# Altium PCB 九键触摸面板-V1.PcbDoc
Units mm, origin at the board's own origin, x right, y up, seen from the top; angles counter-clockwise.
Board outline 77.48 x 77.48 mm, 2 copper layers (Top Layer, Bottom Layer), stack 1.571 mm thick; 101 components, 72 nets, 255 pads, 242 vias.
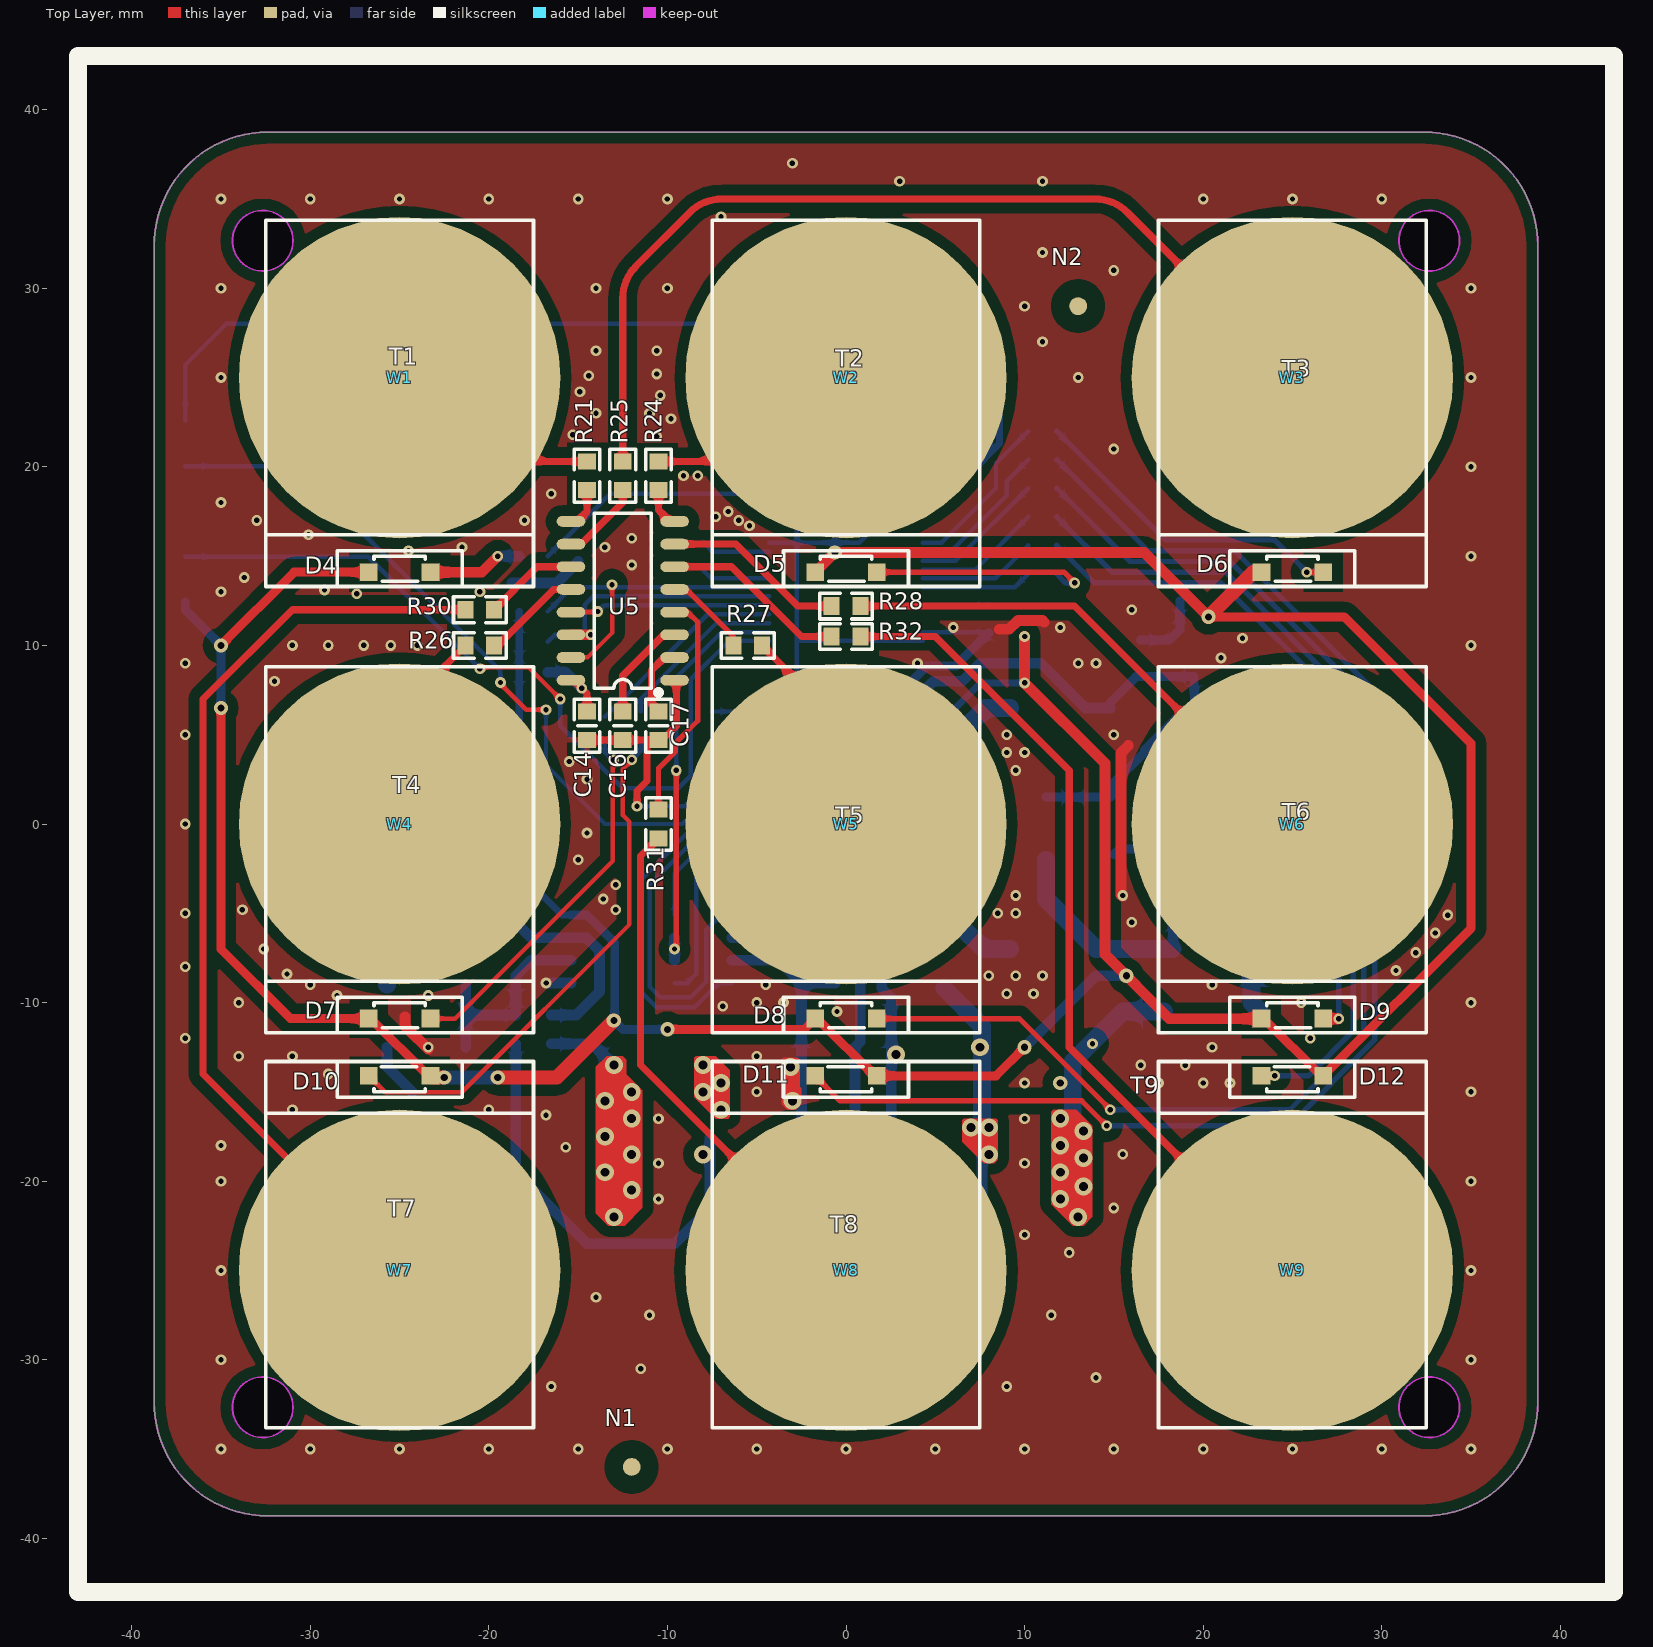
[diagram p0: Top Layer view]
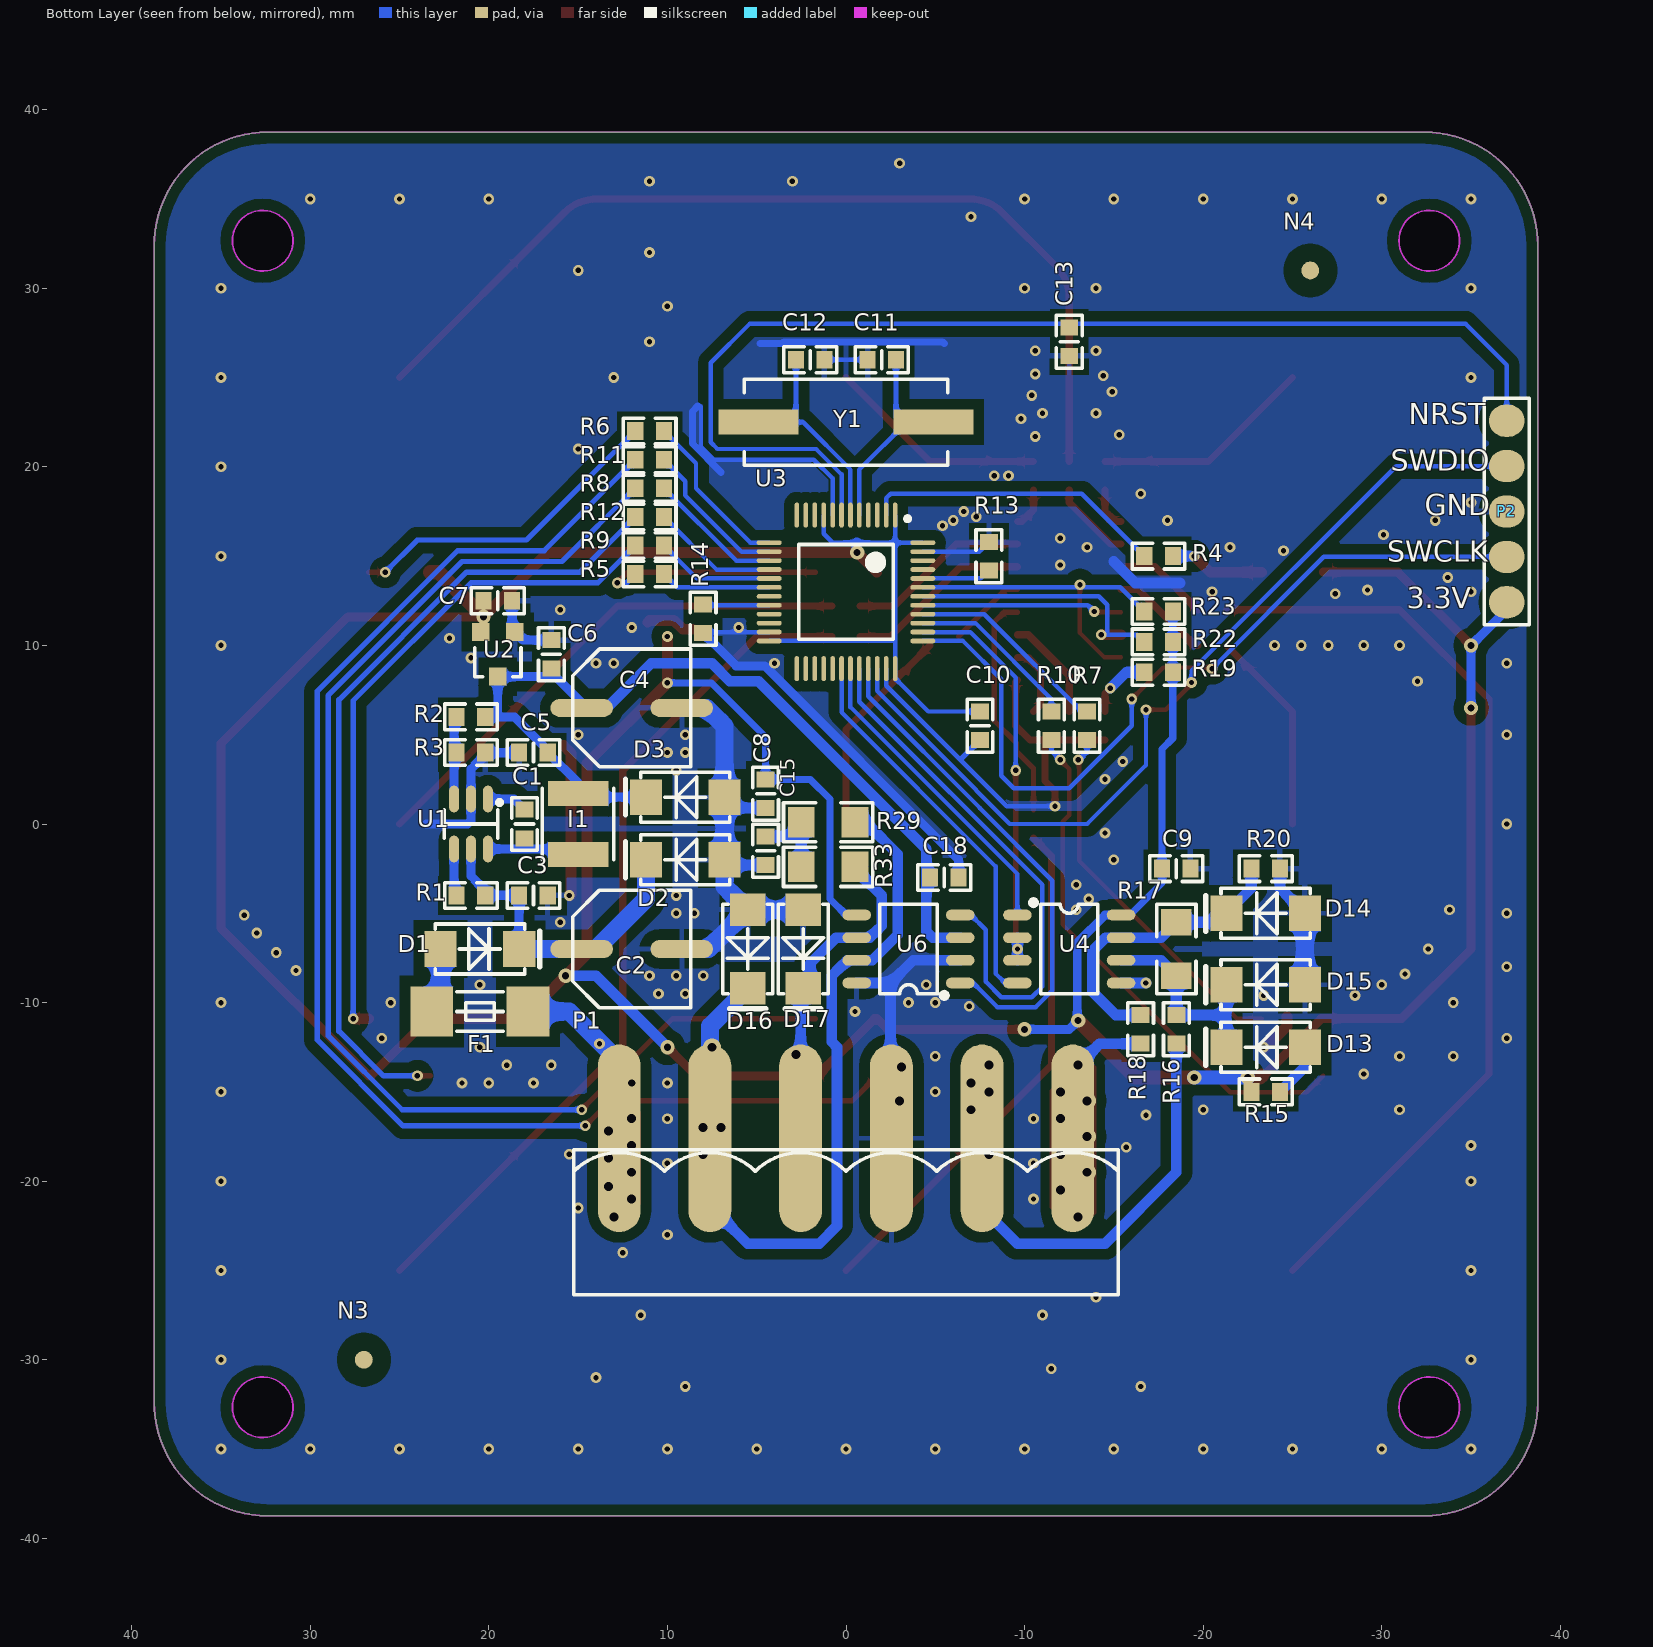
[diagram p1: Bottom Layer view, seen from below]
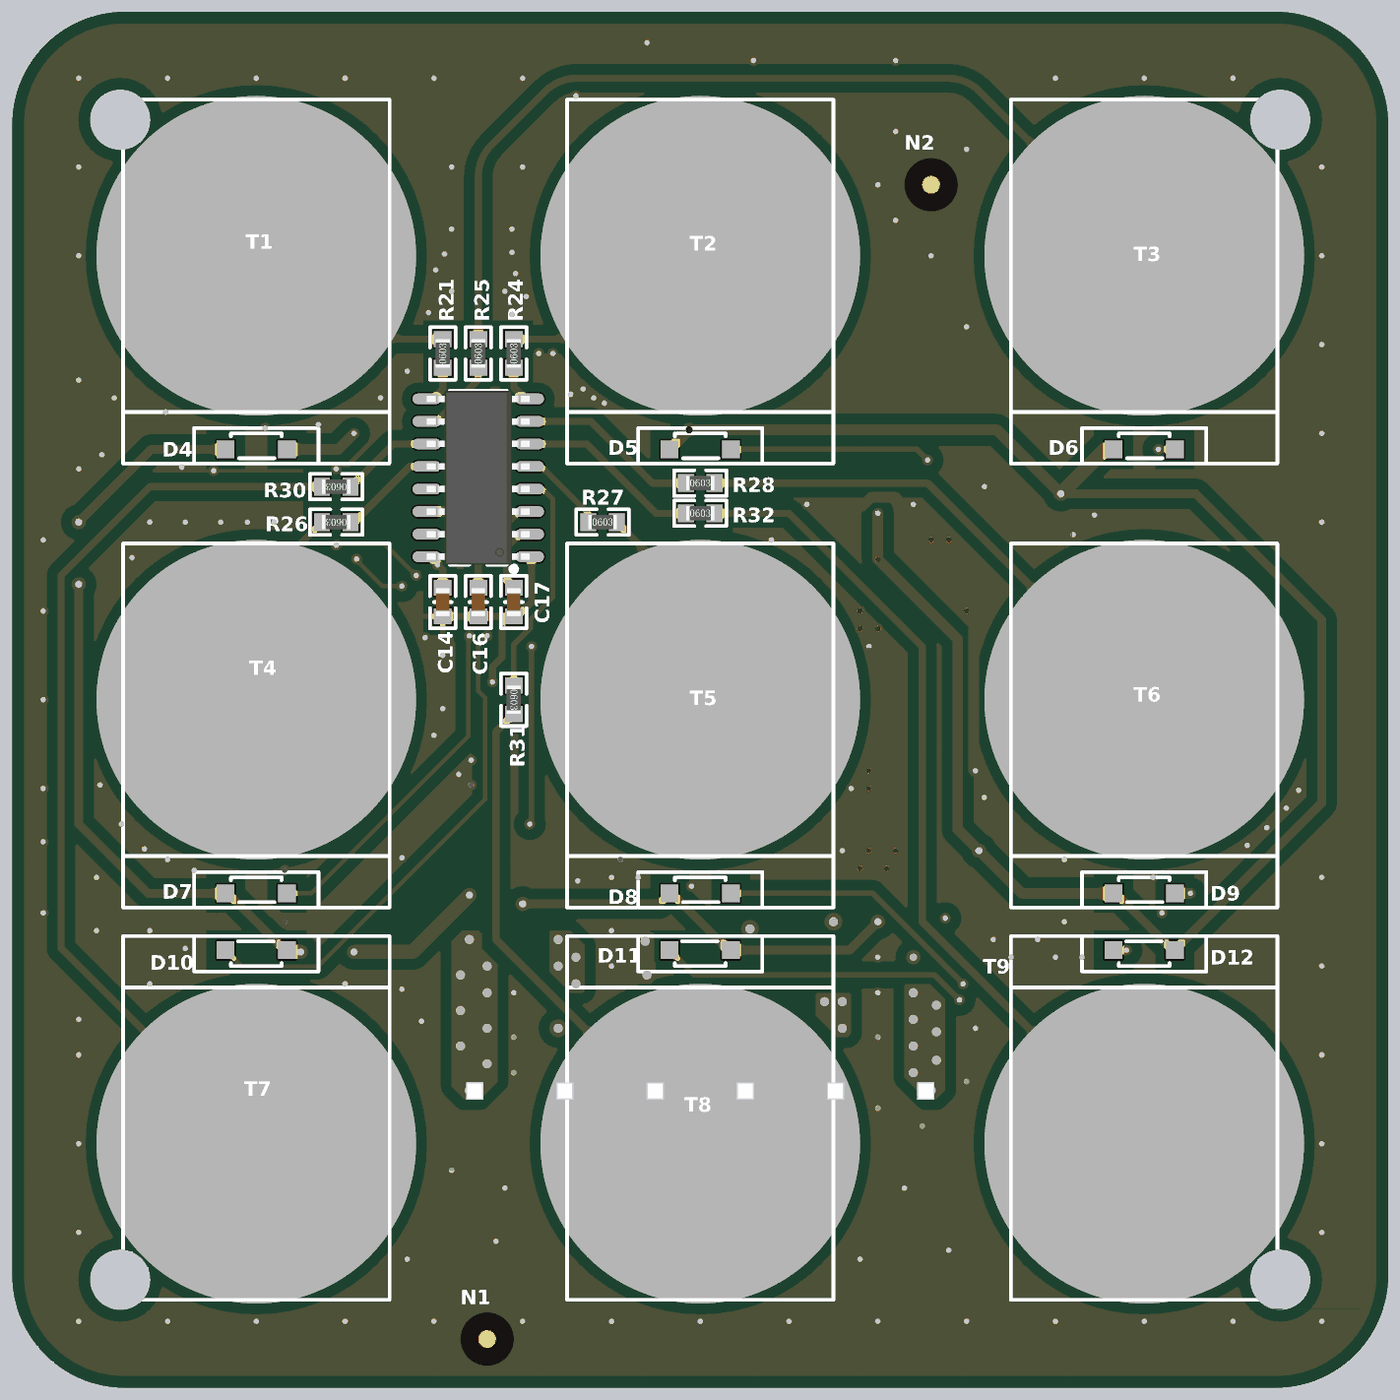
[diagram p2: 3D render of the assembled board from above, using the file's embedded part models]
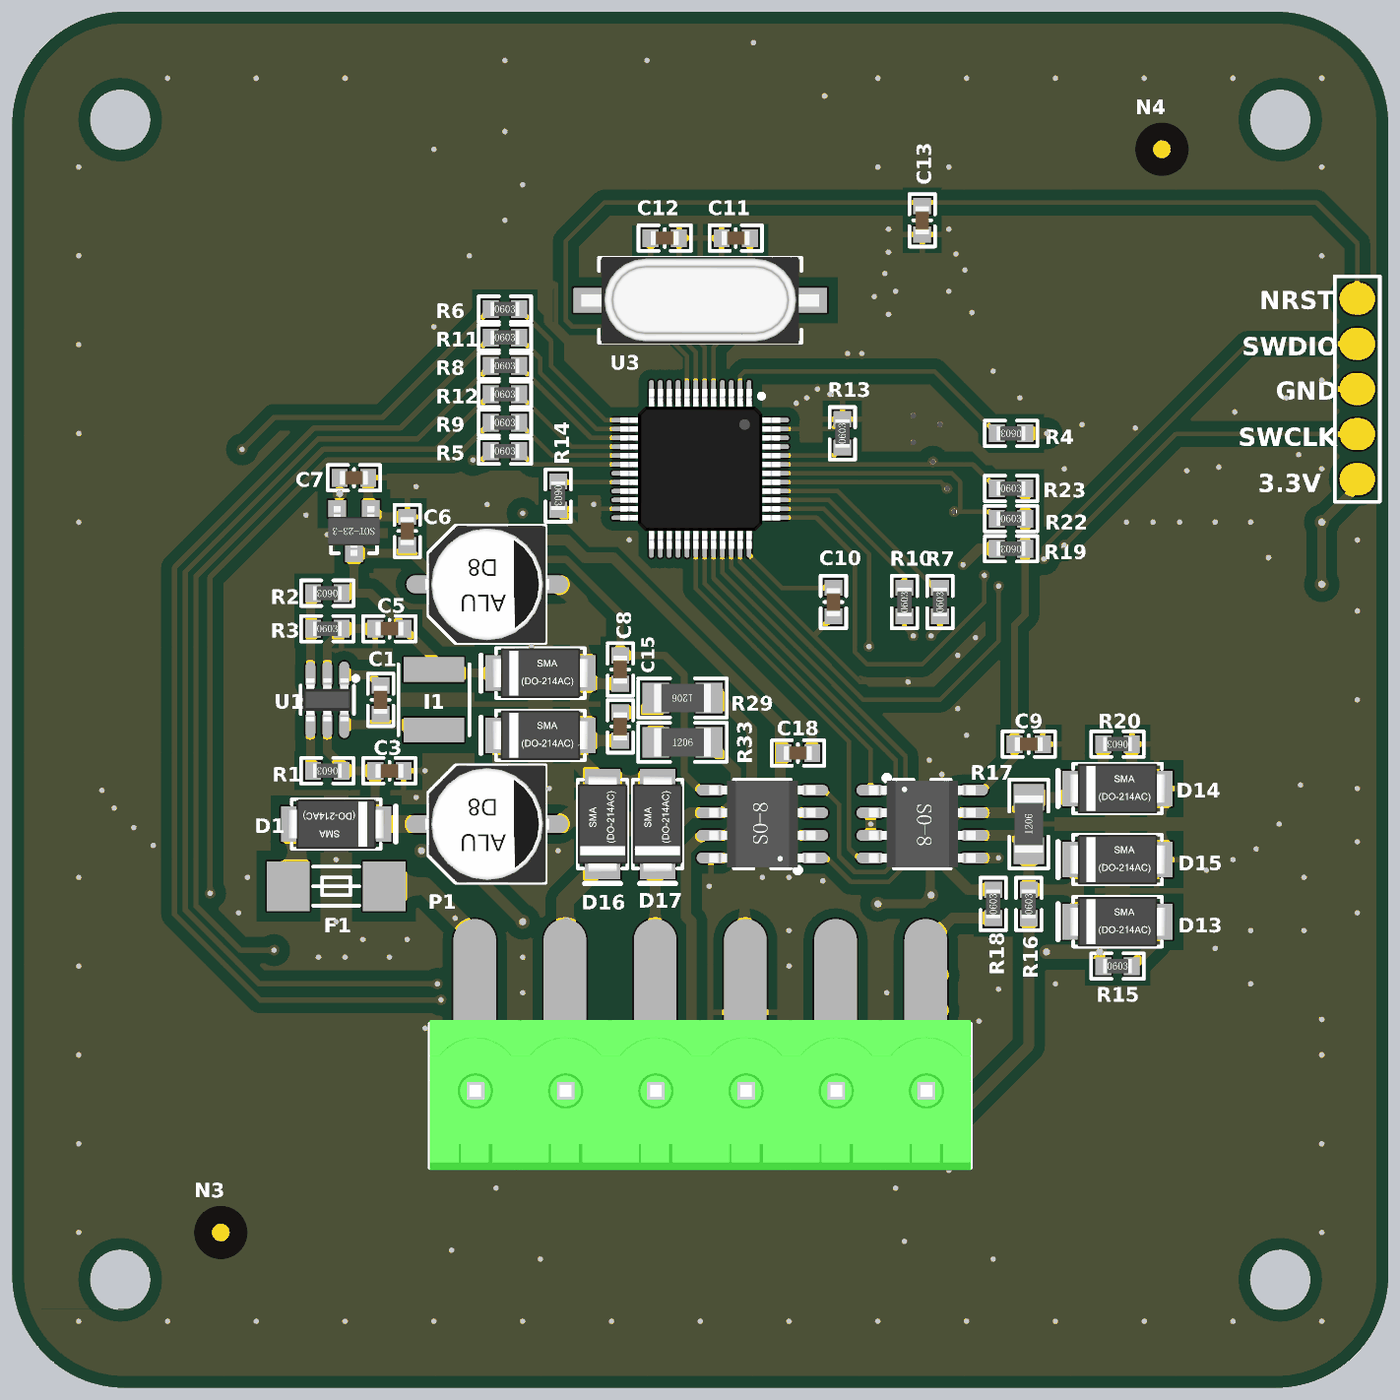
[diagram p3: 3D render of the assembled board from below, using the file's embedded part models]

## Layer stack, top to bottom
Top Solder: solder mask 0.0102, Solder Resist, Dk 3.5
Top Layer: signal copper 0.0356
Dielectric1: dielectric 1.5, FR-4, Dk 4.8
Bottom Layer: signal copper 0.0356
Bottom Solder: solder mask 0.0102, Solder Resist, Dk 3.5

## Board outline
-32.4,-38.74 cw(c-32.4,-32.4) -38.74,-32.4 -38.74,32.4 cw(c-32.4,32.4) -32.4,38.74 32.4,38.74 cw(c32.4,32.4) 38.74,32.4 38.74,-32.4 cw(c32.4,-32.4) 32.4,-38.74
cut-out: 30.962,-32.663 ccw(c32.662,-32.663) 32.662,-34.362 ccw(c32.662,-32.663) 34.362,-32.663 ccw(c32.662,-32.663) 32.662,-30.963 ccw(c32.662,-32.663)
cut-out: -32.663,-34.362 cw(c-32.663,-32.663) -34.363,-32.663 cw(c-32.663,-32.663) -32.663,-30.963 cw(c-32.663,-32.663) -30.963,-32.663 cw(c-32.663,-32.663)
cut-out: 32.662,30.963 cw(c32.662,32.663) 30.962,32.663 cw(c32.662,32.663) 32.662,34.362 cw(c32.662,32.663) 34.362,32.663 cw(c32.662,32.663)
cut-out: -32.663,30.963 cw(c-32.663,32.663) -34.363,32.663 cw(c-32.663,32.663) -32.663,34.362 cw(c-32.663,32.663) -30.963,32.663 cw(c-32.663,32.663)

## Design rules (kind name [scope] priority, off if disabled: settings)
Clearance Clearance敷铜间隔 [InPolygon] p1: gap=0.6
Clearance Clearance通用间隔 [All] p2: gap=0.3
PlaneConnect [All] p1: planeconnectstyle=Relief reliefexpansion=0.508 reliefentries=4 reliefconductorwidth=0.3 reliefairgap=0.3
PolygonConnect PolygonConnect_过孔 [All vs IsVia] p1: connectstyle=Direct reliefconductorwidth=0.254 reliefentries=4 polygonreliefangle="90 Angle" airgapwidth=0.254
PolygonConnect [All] p2: connectstyle=Relief reliefconductorwidth=0.3 reliefentries=4 polygonreliefangle="90 Angle" airgapwidth=0.6
RoutingVias [All] p1: holewidth=0.5 width=1 viastyle="Through Hole" minholewidth=0.4 minwidth=0.8 maxholewidth=10 maxwidth=10
SolderMaskExpansion [All] p1: expansion=0.102
Width [All] p1: maxlimit=10 minlimit=0.25 preferedwidth=0.5
29 further rules are at their usual default settings.

## Components (designator, comment, footprint, x,y, rotation, side; value= is the part's Value field where it differs from the comment)
C1 "104" C-0603 18,0 r90 bottom
C2 "100UF/35V" 贴片固态电容6.3*7.7 12,-7 r180 bottom
C3 "104" C-0603 17.5,-4 r0 bottom
C4 "470UF/10V" 贴片固态电容6.3*7.7 12,6.5 r180 bottom
C5 "104" C-0603 17.5,4 r180 bottom
C6 "224" C-0603 16.5,9.5 r270 bottom
C7 "106" C-0603 19.5,12.5 r0 bottom
C8 "104" C-0603 4.5,1.7 r90 bottom
C9 "104" C-0603 -18.5,-2.5 r0 bottom
C10 "104" C-0603 -7.5,5.5 r90 bottom
C11 "20P" C-0603 -2,26 r180 bottom
C12 "20P" C-0603 2,26 r0 bottom
C13 "104" C-0603 -12.5,27 r90 bottom
C14 "104" C-0603 -14.5,5.5 r90 top
C15 "472" C-0603 4.5,-1.5 r90 bottom
C16 "4.7p" C-0603 -12.5,5.5 r90 top
C17 "472" C-0603 -10.5,5.5 r90 top
C18 "224" C-0603 -5.5,-3 r0 bottom
D1 "M7" SMA 20.5,-7 r0 bottom
D2 "SMAJ30A" SMA 9,-2 r180 bottom
D3 "SMAJ5.0A" SMA 9,1.5 r180 bottom
D4 "" LED-335侧面绿色-M -25,14.1 r180 top
D5 "" LED-335侧面绿色-M 0,14.1 r180 top
D6 "" LED-335侧面绿色-M 25,14.1 r180 top
D7 "" LED-335侧面绿色-M -25,-10.9 r180 top
D8 "" LED-335侧面绿色-M 0,-10.9 r180 top
D9 "" LED-335侧面绿色-M 25,-10.9 r180 top
D10 "" LED-335侧面绿色-M -25,-14.1 r0 top
D11 "" LED-335侧面绿色-M 0,-14.1 r0 top
D12 "" LED-335侧面绿色-M 25,-14.1 r0 top
D13 "SS12" SMA -23.5,-12.5 r180 bottom
D14 "SMAJ5.0A" SMA -23.5,-5 r180 bottom
D15 "SMAJ5.0A" SMA -23.5,-9 r180 bottom
D16 "SMAJ5.0A" SMA 5.5,-7 r90 bottom
D17 "SMAJ5.0A" SMA 2.4,-7 r90 bottom
F1 "F0.5A" FUSE-1808 20.5,-10.5 r0 bottom
I1 "10uH" 4030 15,0 r90 bottom
N1 "光学定位点" MARK-1mm-3mm -12,-36 r0 top
N2 "光学定位点" MARK-1mm-3mm 13,29 r0 top
N3 "光学定位点" MARK-1mm-3mm 27,-30 r180 bottom
N4 "光学定位点" MARK-1mm-3mm -26,31 r180 bottom
P1 "" KF2EDG5.08V-6P-贴片 0,-22 r180 bottom
P2 "ST-LINK" 5P下载口 -37,17.5 r90 bottom
R1 "100K" R-0603 21,-4 r0 bottom
R2 "11K" R-0603 21,6 r0 bottom
R3 "2.1K" R-0603 21,4 r180 bottom
R4 "47" R-0603 -17.5,15 r0 bottom
R5 "47" R-0603 11,14 r180 bottom
R6 "47" R-0603 11,22 r180 bottom
R7 "47" R-0603 -13.5,5.5 r90 bottom
R8 "47" R-0603 11,18.8 r180 bottom
R9 "47" R-0603 11,15.6 r180 bottom
R10 "47" R-0603 -11.5,5.5 r90 bottom
R11 "47" R-0603 11,20.4 r180 bottom
R12 "47" R-0603 11,17.2 r180 bottom
R13 "10K" R-0603 -8,15 r90 bottom
R14 "10K" R-0603 8,11.5 r270 bottom
R15 "1K" R-0603 -23.5,-15 r180 bottom
R16 "10" R-0603 -18.5,-11.5 r90 bottom
R17 "1K" R-1206 -18.5,-7 r90 bottom
R18 "10" R-0603 -16.5,-11.5 r90 bottom
R19 "20" R-0603 -17.5,8.5 r0 bottom
R20 "1K" R-0603 -23.5,-2.5 r0 bottom
R21 "1K" R-0603 -14.5,19.5 r90 top
R22 "10K" R-0603 -17.5,10.2 r180 bottom
R23 "10K" R-0603 -17.5,11.9 r180 bottom
R24 "1K" R-0603 -10.5,19.5 r90 top
R25 "1K" R-0603 -12.5,19.5 r90 top
R26 "1K" R-0603 -20.5,10 r180 top
R27 "1K" R-0603 -5.5,10 r0 top
R28 "1K" R-0603 0,12.2 r0 top
R29 "62" R-1206 1,0.1 r0 bottom
R30 "1K" R-0603 -20.5,12 r180 top
R31 "1K" R-0603 -10.5,0 r270 top
R32 "1K" R-0603 0,10.5 r0 top
R33 "62" R-1206 1,-2.4 r180 bottom
T1 "" 焊点1mm -25,25 r0 top
T2 "" 焊点1mm 0,25 r0 top locked
T3 "" 焊点1mm 25,25 r0 top locked
T4 "" 焊点1mm -25,0 r0 top locked
T5 "" 焊点1mm 0,0 r0 top locked
T6 "" 焊点1mm 25,0 r0 top locked
T7 "" 焊点1mm -25,-25 r0 top locked
T8 "" 焊点1mm 0,-25 r0 top locked
T9 "" 焊点1mm 25,-25 r0 top locked
U1 "BL9341" SOT-23-6-m 21,0 r90 bottom
U2 "ME6206A33M3G" SOT-23 19.5,9.5 r90 bottom
U3 "GD32F103C8T6" LQFP48-L 0,13 r0 bottom
U4 "TP8485E-SR" SOP-8-m -12.5,-7 r270 bottom
U5 "XW09A" SOP-16-M -12.5,12.5 r90 top
U6 "TJA1051T/3" SOP-8-M -3.5,-7 r90 bottom
W1 "导光板" 导光板20.5*15*2 -25,25 r0 top locked
W2 "导光板" 导光板20.5*15*2 0,25 r0 top locked
W3 "导光板" 导光板20.5*15*2 25,25 r0 top locked
W4 "导光板" 导光板20.5*15*2 -25,0 r0 top locked
W5 "导光板" 导光板20.5*15*2 0,0 r0 top locked
W6 "导光板" 导光板20.5*15*2 25,0 r0 top locked
W7 "导光板" 导光板20.5*15*2 -25,-25 r180 top locked
W8 "导光板" 导光板20.5*15*2 0,-25 r180 top locked
W9 "导光板" 导光板20.5*15*2 25,-25 r180 top locked
Y1 "8M" HC-49SMD 0,22.5 r180 bottom

## Footprints (in the part's own frame and the unit in brackets; to place one, negate y for a bottom-side part, rotate by r counter-clockwise, add the part's x,y. Pads: shape width x height; smd on the part's side, far side on the other; paste and mask are expansions set on the pad)
5P下载口 [mm]
  oval 1.8x2 smd paste-1: 1(-5.08,0) 2(-2.54,0) 3(0,0) 4(2.54,0) 5(5.08,0)
  silkscreen extent -6.35,-1.27 6.35,1.27
4030 [mm]
  rect 1.4x3.4 smd: 1(-1.7,0) 2(1.7,0)
  silkscreen extent -2,-2 2,2, body extent -2,-2 2,2, height 3
C-0603 [mm]
  rect 0.9x1 smd: 1(-0.8,0) 2(0.8,0)
  silkscreen extent -1.48,-0.72 1.48,0.72, body extent -0.8,-0.4 0.8,0.4, height 0.6
FUSE-1808 [mm]
  rect 2.4x2.8 smd: 1(-2.7,0) 2(2.7,0)
  silkscreen extent -1.3,-1.1 1.3,1.1, body extent -3,-1.3 3,1.3, height 2.6
HC-49SMD [mm]
  rect 4.5x1.4 smd: 1(-4.9,0) 2(4.9,0)
  silkscreen extent -5.7,-2.4 5.7,2.4, body extent -6.7,-2.46 6.7,2.44, height 4
KF2EDG5.08V-6P-贴片 [mm]
  oval 2.4x10.5 smd: 1(-12.7,4.4) 2(-7.62,4.4) 3(-2.54,4.4) 4(2.54,4.4) 5(7.62,4.4) 6(12.7,4.4)
  silkscreen extent -15.24,-4.35 15.24,3.75, body extent -15.24,-4.5 15.24,3.97, height 12.01
LED-335侧面绿色-M [mm]
  rect 1x1 smd: 1(1.725,0) 2(-1.725,0)
  silkscreen extent -1.43,-0.9 1.43,0.5
LQFP48-L [mm]
  oval 0.26x1.4 smd: 1(-2.75,-4.3) 2(-2.25,-4.3) 3(-1.75,-4.3) 4(-1.25,-4.3) 5(-0.75,-4.3) 6(-0.25,-4.3) 7(0.25,-4.3) 8(0.75,-4.3) 9(1.25,-4.3) 10(1.75,-4.3) 11(2.25,-4.3) 12(2.75,-4.3) 25(2.75,4.3) 26(2.25,4.3) 27(1.75,4.3) 28(1.25,4.3) 29(0.75,4.3) 30(0.25,4.3) 31(-0.25,4.3) 32(-0.75,4.3) 33(-1.25,4.3) 34(-1.75,4.3) 35(-2.25,4.3) 36(-2.75,4.3)
  oval 1.4x0.26 smd: 13(4.3,-2.75) 14(4.3,-2.25) 15(4.3,-1.75) 16(4.3,-1.25) 17(4.3,-0.75) 18(4.3,-0.25) 19(4.3,0.25) 20(4.3,0.75) 21(4.3,1.25) 22(4.3,1.75) 23(4.3,2.25) 24(4.3,2.75) 37(-4.3,2.75) 38(-4.3,2.25) 39(-4.3,1.75) 40(-4.3,1.25) 41(-4.3,0.75) 42(-4.3,0.25) 43(-4.3,-0.25) 44(-4.3,-0.75) 45(-4.3,-1.25) 46(-4.3,-1.75) 47(-4.3,-2.25) 48(-4.3,-2.75)
  silkscreen extent -3.57,-4.22 2.65,2.65, body extent -4.5,-4.5 4.5,4.5, height 1.5
MARK-1mm-3mm [mm]
  round 1 smd paste-0.6 mask+1: 1(0,0)
  Top Layer pour cut-out: -1.5,0 -1.386,-0.574 -1.061,-1.061 -0.574,-1.386 0,-1.5 0,-1.5 0.574,-1.386 1.061,-1.061 1.386,-0.574 1.5,0 1.5,0 1.386,0.574 1.061,1.061 0.574,1.386 0,1.5 0,1.5 -0.574,1.386 -1.061,1.061 -1.386,0.574 -1.5,0
R-0603 [mm]
  rect 0.9x1 smd: 1(-0.8,0) 2(0.8,0)
  silkscreen extent -1.48,-0.72 1.48,0.72, body extent -0.8,-0.4 0.8,0.4, height 0.45
R-1206 [mm]
  rect 1.5x1.7 smd: 1(-1.5,0) 2(1.5,0)
  silkscreen extent -2.5,-1.1 2.5,1.1, body extent -1.6,-0.8 1.6,0.8, height 0.6
SMA [mm]
  rect 1.8x2 smd: 1(2.2,0) 2(-2.2,0)
  silkscreen extent -3.35,-1.4 2.5,1.4, body extent -2.75,-1.4 2.75,1.4, height 2.6
SOP-8-m [mm]
  oval 0.6x1.6 smd: 1(-1.905,-2.9) 2(-0.635,-2.9) 3(0.635,-2.9) 4(1.905,-2.9) 5(1.905,2.9) 6(0.635,2.9) 7(-0.635,2.9) 8(-1.905,2.9)
  silkscreen extent -2.89,-2.3 2.5,1.6, body extent -2.45,-3 2.45,3, height 1.7
SOP-8-M [mm]
  oval 0.6x1.6 smd: 1(-1.905,-2.9) 2(-0.635,-2.9) 3(0.635,-2.9) 4(1.905,-2.9) 5(1.905,2.9) 6(0.635,2.9) 7(-0.635,2.9) 8(-1.905,2.9)
  silkscreen extent -2.89,-2.3 2.5,1.6, body extent -2.45,-3 2.45,3, height 1.7
SOP-16-M [mm]
  oval 0.6x1.6 smd: 1(-4.445,-2.9) 2(-3.175,-2.9) 3(-1.905,-2.9) 4(-0.635,-2.9) 5(0.635,-2.9) 6(1.905,-2.9) 7(3.175,-2.9) 8(4.445,-2.9) 9(4.445,2.9) 10(3.175,2.9) 11(1.905,2.9) 12(0.635,2.9) 13(-0.635,2.9) 14(-1.905,2.9) 15(-3.175,2.9) 16(-4.445,2.9)
  silkscreen extent -5.43,-2.3 4.9,1.6, body extent -4.9,-2.9 4.9,2.9, height 1.75
SOT-23 [mm]
  rect 1x1 smd: 1(1.25,-0.95) 2(1.25,0.95) 3(-1.25,0)
  silkscreen extent -1.25,-1.3 0.38,1.3, body extent -1.4,-1.45 1.4,1.45, height 1.2
SOT-23-6-m [mm]
  oval 1.5x0.55 smd: 1(1.4,-0.95) 2(1.4,0) 3(1.4,0.95) 4(-1.4,0.95) 5(-1.4,0) 6(-1.4,-0.95)
  silkscreen extent -0.8,-1.7 1.3,1.5, body extent -1.21,-1.4 1.21,1.4, height 1.08
导光板20.5*15*2 [mm]
  silkscreen extent -7.5,-11.7 7.5,8.8, body extent -7.5,-11.7 7.5,8.8, height 2
焊点1mm [mm]
  round 18 smd: 1(0,0)
贴片固态电容6.3*7.7 [mm]
  oval 3.5x1 smd: 1(-2.8,0) 2(2.8,0)
  silkscreen extent -3.3,-3.3 3.3,3.3, body extent -3.5,-3.3 3.5,3.3, height 7.71

## Part data
C1 C3 C5 C6 C7 C8 C9 C10 C18: library part Cap, "Capacitor"
C2 C4: library part "Cap Pol1", "Polarized Capacitor (Radial)"
C11 C12 C13 C14 C15 C16 C17: library part Cap-0603, "0805"
D1: "SMA"
D2 D3 D14 D15 D16 D17: library part TVS-1, "SMB"
D4 D5 D6 D7 D8 D9 D10 D11 D12: library part LED-0603-Blue
D13: library part SS14, "SMA"
F1: library part "Fuse 1", "Fuse"
I1: library part Inductance3
N1 N2 N3 N4: library part 无引脚
P1: library part "Header 6", "Header, 6-Pin"
P2: library part ST-LINK-STM32
R1 R2 R3 R4 R5 R6 R7 R8 R9 R10 R11 R12 R13 R14 R19 R21 R22 R23 R24 R25 R26 R27 R28 R30 R31 R32: library part Res2-0603, "0603"
R15 R16 R17 R18 R20 R29 R33: library part Res2, "Resistor"
T1 T2 T3 T4 T5 T6 T7 T8 T9: library part 测试点
U2: "LDO稳压 SOT-23"
U4: library part MAX3082, "RS485总线转串口"
Y1: library part 晶振

## Via types
v1: diameter 0.6, hole 0.3, Top Layer to Bottom Layer, tented both sides, 202 vias
v2: diameter 1, hole 0.5, Top Layer to Bottom Layer, tented both sides, 29 vias
v3: diameter 0.8, hole 0.4, Top Layer to Bottom Layer, tented both sides, 11 vias

## Nets (pads, with @x,y where several pads share a name; then routed paths per layer and width w, separated by ;. In a path a pad name is that pad's centre, name@x,y a point inside that pad or via, vN(x,y) a via of type N, cw(c..) or ccw(c..) an arc to the next point about the centre after c; other vN are vias at no path point)
3.3V: C7.2 C8.2 C9.2 C10.2 D4.1 D5.1 D6.1 D7.1 D8.1 D9.1 D10.1 D11.1 D12.1 P2.1 R15.1 R19.1 R22.2 R23.2 U2.2 U3.1 U3.9 U3.24 U3.36 U3.48 U4.8 U6.5 | length 267
  Top Layer w0.5: v3(-35,6.5) -35,-7 -31.1,-10.9 D7.1 -26.6,-10.9 -23.4,-14.1 D10.1 ; v3(-35,10) -30.9,14.1 D4.1 ; v3(-10,-11.5) -2.325,-11.5 D8.1@-1.825,-11 ; D8.1 D8.1@-1.825,-11 ; D11.1@1.6,-14.1 -1.6,-10.9 -1.7,-11 D8.1@-1.825,-11 ; D11.1 8.4,-14.1 v3(10,-12.5) ; v3(20.3,11.6) 27.9,11.6 35,4.5 35,-5.825 D12.1 ; D9.1@23.4,-10.9 D12.1@26.6,-14.1
  Top Layer w0.6: D5.1 v3(-0.625,15.2) 16.7,15.2 v3(20.3,11.6) ; v1(10,10.5) v1(10,7.9) 14.5,3.4 14.5,-7.3 18.1,-10.9 D9.1
  Top Layer w0.8: D10.1 -23.175,-14.2 v3(-22.5,-14.2) ; v3(-19.5,-14.2) -16.2,-14.2 v3(-13,-11) ; v3(20.3,11.6) 22.8,14.1 D6.1
  Bottom Layer w0.25: C10.2 -4.6,6.3 -2.75,8.15 U3.36 -2.75,15.75 ; U3.48 -2.75,15.75 ; U3.1 -2.75,15.75 ; -2.65,10.25 U3.24 ; U3.9 1.25,16.25 0.75,15.75 -0.6,15.75 -2.75,15.75
  Bottom Layer w0.4: R23.2 R19.1 -18.3,4.8 -17.7,4.2 C9.2 -17.7,-3.3 -15.905,-5.095 U4.8 ; U6.5 0.005,-5.095 0.9,-4.2 0.9,1.4 2,2.5 C8.2 4.5,4.867 7.533,7.9 v1(10,7.9)
  Bottom Layer w0.5: P2.1 -37,12 v3(-35,10) v3(-35,6.5) ; U4.8 -14.505,-5.095 -12.95,-6.65 -12.95,-10.95 v3(-13,-11) -12.5,-11.5 v3(-10,-11.5)
  Bottom Layer w0.6: v3(-0.625,15.2) -0.6,15.225 -0.6,15.75 ; v3(10,-12.5) 14,-8.5 v3(15.7,-8.5)
  Bottom Layer w0.8: v3(-22.5,-14.2) v3(-19.5,-14.2)
5V: C4.1 C5.2 C6.2 C18.2 D3.2 I1.2 R2.1 U2.3 U6.3 | length 50.3
  Bottom Layer w0.5: D3.2 14.8,1.5 I1.2 15,2.3 C5.2 16.7,4.128 18.572,6 R2.1 ; C4.1 14.8,6.8 16.25,8.25 U2.3 19.5,6.114
  Bottom Layer w0.6: U6.3 -4.865,-6.365 -4.5,-6 -4.5,-1.4 4.9,8 6.502,8 7.502,9 10.9,9 13.4,6.5 C4.1
24V: F1.1 P1.1 | length 10.6
  Bottom Layer w1: P1.1 12.7,-13.3 15.5,-10.5 F1.1
  other v1: 13.8,-12.3
  other v2: 13,-22 12,-21 13.3,-20.3 12,-19.5 13.3,-18.7 12,-18 13.3,-17.2 12,-16.5
  other v3: 12,-14.5
485-A: P1.5 R16.1 | length 24.5
  Bottom Layer w0.6: R16.1 -18.5,-19.5 -14.5,-23.5 -9.6,-23.5 -7.62,-21.52 P1.5
  other v2: -8,-18.5 -7,-16 -8,-15 -7,-14.5 -8,-13.5
485-B: P1.6 R18.1 | length 8.2
  Bottom Layer w0.6: R18.1 -14.2,-12.3 -12.7,-13.8 P1.6
  other v2: -13,-22 -12,-20.5 -13.5,-19.5 -12,-18.5 -13.5,-17.5 -12,-16.5 -13.5,-15.5 -12,-15 -13,-13.5
485-RE/DE: U3.38 U4.2 U4.3 | length 22.8
  Top Layer w0.3: v1(-9.6,-7) -9.5,-6.9 v1(-9.5,3)
  Bottom Layer w0.25: v1(-9.5,3) -9.5,8.2 -6.95,10.75 U3.38
  Bottom Layer w0.6: U4.3 v1(-9.6,-7) U4.2
485-RXD: U3.31 U4.1 | length 17.7
  Bottom Layer w0.25: U4.1 -9.6,-2.8 -0.25,6.55 U3.31
485-TXD: U3.30 U4.4 | length 22.1
  Bottom Layer w0.25: U4.4 -8.905,-8.905 -8.375,-8.375 -8.375,-2.375 0.25,6.25 U3.30
CAN-H: D16.2 P1.2 R29.1 U6.7 | length 47.9
  Bottom Layer w0.6: R29.1@-0.5,0 -1.2,0 -2.9,-1.7 -2.9,-6.2 -1.465,-7.635 U6.7 -0.065,-7.635 0.8,-8.5 0.8,-12.2 0.5,-12.5 0.5,-22.5 1.5,-23.5 5.5,-23.5 7.62,-21.38 P1.2
  Bottom Layer w1: D16.2 7.62,-11.32 P1.2
  other v2: 8,-18.5 7,-17 8,-17 7.5,-12.5
CAN-L: D17.2 P1.3 R33.2 U6.6 | length 18.7
  Bottom Layer w0.6: R33.2@-0.5,-2.5 -2,-4 -2,-5.7 -1.335,-6.365 U6.6 0.565,-6.365 2,-7.8 2,-9.2 2.54,-9.74 P1.3
  other v2: 2.8,-12.9
CAN-RXD: U3.32 U6.4 | length 30.5
  Bottom Layer w0.25: U6.4 -6.995,-5.095 -7.825,-5.925 -7.825,-8.825 -8.7,-9.7 -10.4,-9.7 -11,-9.1 -11,-3.4 -0.75,6.85 U3.32
CAN-TXD: U3.33 U6.1 | length 28.4
  Bottom Layer w0.25: U6.1 -7.127,-8.905 -8.472,-10.25 -10.628,-10.25 -11.55,-9.328 -11.55,-3.172 -7.5,0.878 -7.5,0.9 -1.25,7.15 U3.33
GND: C2.2 C3.1 C4.2 C5.1 C6.1 C7.1 C8.1 C9.1 C10.1 C11.1 C12.1 C13.1 C14.1 C15.1 C16.1 C17.1 C18.1 D2.1 D3.1 D14.1 D15.1 D16.1 D17.1 P1.4 P2.3 R3.2 R13.2 R14.2 R20.1 U1.2 U2.1 U3.8 U3.23 U3.35 U3.47 U4.5 U5.1 U6.2 U6.8 | length 164
  Top Layer w0.4: C14.1 C16.1 -11.2,4.7 ; v1(-11.7,1) -11.7,1.85 -11.15,2.4 -11.15,4.65 -11.2,4.7 ; U5.1 -9.5,7.955 -9.5,5.5 -10.3,4.7 C17.1 -11.2,4.7
  Top Layer w0.6: -24.7,-10.8 -24.7,-11.324 -24.024,-12 -24,-12 v1@-23.4,-12.6 ; 8.6,10.9 9.127,10.9 9.627,11.4 11,11.4 11.1,11.3 ; v1@15.462,-4.038 15.4,-3.976 15.4,3.976 15.8,4.376 15.8,4.4
  Bottom Layer w0.25: v1(-11.7,1) -9,1 -2.25,7.75 U3.35 ; R13.2 -7.45,15.25 U3.47 ; C11.1 C12.1 ; U3.8 0.75,19.35 1.8,20.4 7.4,20.4 8.125,21.125 8.125,23.4 ; U3.23 7.95,10.75 R14.2
  Bottom Layer w0.3: C10.1 -6.5,3.7
  Bottom Layer w0.4: -5.5,26.9 -5.4,27 3.457,27 3.557,26.9 4.8,26.9 ; 7,19.7 8.6,21.3 8.6,23.1 8.3,23.4
  Bottom Layer w0.5: C18.1 -6.3,-1.998 4.548,8.85 6.15,8.85 R14.2 ; C6.1 18.1,10.3 U2.1 18.7,10.9 C7.1 ; C5.1 R3.2 20.2,3.872 21,3.072 U1.2 21,0.2 21.2,0 23.5,0
  Bottom Layer w0.6: D14.1 -24.3,-3.6 R20.1 ; -18.7,13.5 -16.2,13.5 -15,14.7 ; v1(-16.795,-8.905) U4.5 ; U6.2 -3.765,-7.635 -2.495,-8.905 ; P1.4 -2.495,-17.555 -2.495,-8.905 ; U6.8 -2.495,-8.905 ; C15.1 D2.1@6.5,-2.3 ; C8.1 D3.1@6.2,0.9
  Bottom Layer w1: D15.1 D14.1 ; D17.1@2,-4.8 D16.1 ; C2.2 7.7,-7 D16.1 ; C4.2 7.8,6.5 6.8,5.5 D3.1 D2.1 6.8,-3.5 D16.1
  other v1: -35,-35 -30,-35 -25,-35 -20,-35 -15,-35 -10,-35 -5,-35 0,-35 5,-35 10,-35 15,-35 20,-35 25,-35 30,-35 35,-35 -16.5,-31.5 9,-31.5 14,-31 -11.5,-30.5 -35,-30 35,-30 -11,-27.5 11.5,-27.5 -14,-26.5 -35,-25 35,-25 12.5,-24 10,-23 15,-21.5 -10.5,-21 -35,-20 35,-20 -10.5,-19 10,-19 15.5,-18.5 -15.7,-18.1 -35,-18 -10.5,-16.5 10,-16.5 -16.8,-16.3 -31,-16 -20,-16 -5,-15 35,-15 10,-14.5 17.5,-14.5 20,-14.5 21.5,-14.5 -29,-14 16.5,-13.5 19,-13.5 -34,-13 -31,-13 -5,-13 -23.4,-12.5 20.5,-12.5 -37,-12 26,-12 -0.5,-10.5 -6.9,-10.2 -34,-10 -5,-10 -3.5,-10 25.5,-10 35,-10 -28.5,-9.6 -23.4,-9.6 9,-9.5 10.5,-9.5 -30,-9 -4.5,-9 20.5,-9 8,-8.5 9.5,-8.5 11,-8.5 -31.3,-8.4 30.8,-8.2 -37,-8 31.9,-7.2 -32.6,-7 33,-6.1 16,-5.5 33.7,-5.1 -37,-5 8.5,-5 9.5,-5 -33.8,-4.8 -12.9,-4.8 -13.6,-4.2 9.5,-4 15.5,-4 -12.9,-3.4 -15,-2 -14.5,-0.5 -37,0 -14.5,2.5 9.5,3 -15.5,3.5 9,4 10,4 -37,5 9,5 15,5 -32,8 -37,9 4,9 13,9 14,9 21,9.3 -31,10 -29,10 -27,10 -25.5,10 -24,10 35,10 22.2,10.4 6,11 12,11 16,12 -27.4,12.9 -35,13 -20.5,13 -29.2,13.1 -33.7,13.8 -12,14.5 35,15 -24.5,15.3 -21.5,15.5 -13.5,15.5 -12,16 -30.1,16.2 -5.4,16.7 -33,17 -18,17 -6,17 -7.3,17.2 -6.6,17.5 -35,18 -16.5,18.5 -9.1,19.5 -8.3,19.5 35,20 15,21 -10.6,21.7 -15.3,21.8 -9.8,22.7 -14,23 -11,23 -10.4,24 -14.9,24.2 -35,25 13,25 35,25 -14.4,25.1 -10.6,25.2 -14,26.5 -10.6,26.5 11,27 10,29 -35,30 -14,30 -10,30 35,30 15,31 11,32 -7,34 -35,35 -30,35 -25,35 -20,35 -15,35 -10,35 20,35 25,35 30,35 3,36 11,36 -3,37
  other v2: -3,-15.5 -3.1,-13.6
LED1: R4.2 U3.2 | length 17
  Bottom Layer w0.25: R4.2 -13.2,18.5 -2.5,18.5 -2.25,18.25 U3.2
LED2: R5.2 U3.18 | length 6.2
  Bottom Layer w0.25: U3.18 9.45,13.25 R5.2
LED3: R6.2 U3.13 | length 9.3
  Bottom Layer w0.25: U3.13 5.35,15.75 8.4,18.8 8.4,20.2 R6.2
LED4: R7.2 U3.40 | length 11.6
  Bottom Layer w0.25: R7.2@-13.5,6 -7.75,11.75 U3.40
LED5: R8.2 U3.15 | length 7.6
  Bottom Layer w0.25: U3.15 6.15,14.75 R8.2
LED6: R9.2 U3.17 | length 6.7
  Bottom Layer w0.25: U3.17 8.35,13.75 R9.2
LED7: R10.2 U3.39 | length 9.7
  Bottom Layer w0.25: R10.2 -11.5,7 -7.25,11.25 U3.39
LED8: R11.2 U3.14 | length 8.5
  Bottom Layer w0.25: U3.14 5.85,15.25 9,18.4 9,19.2 R11.2
LED9: R12.2 U3.16 | length 7.1
  Bottom Layer w0.25: U3.16 7.25,14.25 R12.2
NetC1_1: C1.1 I1.1 U1.6 | length 5.2
  Bottom Layer w0.5: I1.1 15.3,-1.4 U1.6
NetC1_2: C1.2 U1.1 | length 2.3
  Bottom Layer w0.5: C1.2 18.6,1.4 U1.1
NetC2_1: C2.1 C3.2 D1.2 D2.2 R1.1 U1.5 | length 18
  Bottom Layer w0.5: D1.2 C3.2 R1.1 ; R1.1@20.2,-3.7 21,-2.9 U1.5
  Bottom Layer w1: D2.2 11.2,-4.2 14,-7 C2.1 D1.2
NetC11_2: C11.2 U3.5 Y1.2 | length 11
  Bottom Layer w0.25: Y1.2 -3.4,22.5 -0.75,19.85 U3.5
  Bottom Layer w0.3: Y1.2@-2.8,22.8 C11.2
NetC12_2: C12.2 U3.6 Y1.1 | length 12
  Bottom Layer w0.25: U3.6 -0.25,19.85 2.4,22.5 Y1.1
  Bottom Layer w0.3: Y1.1@2.8,22.8 C12.2
NetC14_2: C14.2 R19.2 U5.16 | length 4.5
  Top Layer w0.4: U5.16 -15.255,8.055 v1(-14.8,7.6) -14.5,7.3 C14.2
  Bottom Layer w0.6: R19.2 -15.7,8.5 v1(-14.8,7.6)
NetC15_2: C15.2 R29.2 R33.1 | length 4.3
  Bottom Layer w0.6: R33.1@2.5,-2.5 R29.2@2.5,0 ; R29.2@2.7,-0.7 C15.2
NetC16_2: C16.2 U5.3 | length 5.9
  Top Layer w0.4: C16.2 -12.5,8.3 -10.205,10.595 U5.3
NetC17_2: C17.2 U5.2 | length 4.1
  Top Layer w0.4: C17.2 -10.9,6.7 -10.9,8.6 -10.175,9.325 U5.2
NetD1_1: D1.1 F1.2 | length 3.7
  Bottom Layer w1: D1.1 22.7,-10 F1.2
NetD4_2: D4.2 R4.1 | length 5.3
  Top Layer w0.6: D4.2 -20.4,14.1 v1(-19.5,15)
  Bottom Layer w0.6: v1(-19.5,15) R4.1
NetD5_2: D5.2 R5.1 | length 12.5
  Top Layer w0.3: D5.2 12.2,14.1 v1(12.8,13.5)
  Bottom Layer w0.3: R5.1 12.3,13.5 v1(12.8,13.5)
NetD6_2: D6.2 R6.1 | length 18.2
  Top Layer w0.3: v1(25.8,14.1) D6.2
  Bottom Layer w0.3: R6.1 17.9,15.9 24,15.9 v1(25.8,14.1)
NetD7_2: D7.2 R7.1 | length 20.9
  Top Layer w0.25: D7.2 -21.9,-10.9 -13.05,-2.05 -13.05,3.55 v1(-13,3.6)
  Bottom Layer w0.25: R7.1 -13.5,4 -13.1,3.6 v1(-13,3.6)
NetD8_2: D8.2 R8.1 | length 72.2
  Top Layer w0.3: D8.2 9.7,-10.9 v1(14.8,-16)
  Bottom Layer w0.3: R8.1 15.9,14.7 21.497,14.7 29,7.197 29,-11.849 24.849,-16 v1(14.8,-16)
NetD9_2: D9.2 R9.1 | length 38.1
  Top Layer w0.6: D9.2 v1(27.6,-10.9)
  Bottom Layer w0.3: R9.1 13.9,13.5 21,13.5 27.6,6.9 v1(27.6,-10.9)
NetD10_2: D10.2 R10.1 | length 29.8
  Top Layer w0.25: D10.2 -25.8,-15.025 -21.525,-15.025 -12.125,-5.625 -12.125,0.125 -12.5,0.5 -12.5,3.075 -12,3.575 v1(-12,3.6)
  Bottom Layer w0.25: v1(-12,3.6) -11.5,4.1 R10.1
NetD11_2: D11.2 R11.1 | length 77.2
  Top Layer w0.3: D11.2 -0.325,-15.5 13.2,-15.5 v1(14.6,-16.9)
  Bottom Layer w0.3: R11.1 16.9,15.3 21.746,15.3 29.6,7.446 29.6,-12.097 24.797,-16.9 v1(14.6,-16.9)
NetD12_2: D12.2 R12.1 | length 45.6
  Top Layer w0.3: D12.2 v1(24,-14.1)
  Bottom Layer w0.3: R12.1 14.9,14.1 21.249,14.1 28.4,6.949 28.4,-11.6 25.9,-14.1 v1(24,-14.1)
NetD13_1: D13.1 R15.2 | length 3.1
  Bottom Layer w0.6: D13.1 -25.7,-13.6 R15.2
NetD13_2: D13.2 D15.2 R16.2 R17.1 U4.6 | length 12
  Bottom Layer w0.6: D13.2 -21.3,-10.7 ; D15.2 -21.3,-10.7 ; U4.6 -17.635,-7.635 R17.1 R16.2 -21.3,-10.7
NetD14_2: D14.2 R17.2 R18.2 R20.2 U4.7 | length 16.3
  Bottom Layer w0.6: R20.2 -22.7,-3.6 D14.2 ; D14.2@-20.8,-5.5 R17.2 -17.635,-6.365 U4.7 -14.535,-6.365 -13.8,-7.1 -13.8,-9.4 -15.1,-10.7 R18.2
NetR1_2: R1.2 U1.4 | length 2.7
  Bottom Layer w0.5: R1.2 21.95,-3.85 U1.4
NetR2_2: R2.2 R3.1 U1.3 | length 4.7
  Bottom Layer w0.5: R2.2 21.95,5.85 U1.3
NetR13_1: R13.1 U3.44 | length 3.9
  Bottom Layer w0.25: R13.1 -7.55,13.75 U3.44
NetR14_1: R14.1 U3.20 | length 3.7
  Bottom Layer w0.25: U3.20 7.95,12.25 R14.1
NetR21_1: R21.1 U5.9 | length 2.3
  Top Layer w0.4: U5.9 -15.055,16.945 -14.5,17.5 R21.1
NetR21_2: R21.2 T1.1 | length 12.4
  Top Layer w0.4: T1.1 -20.3,20.3 R21.2
NetR24_1: R24.1 U5.8 | length 2.3
  Top Layer w0.4: R24.1 -10.5,17.6 -9.845,16.945 U5.8
NetR24_2: R24.2 T2.1 | length 12.4
  Top Layer w0.4: R24.2 -4.7,20.3 T2.1
NetR25_1: R25.1 U5.10 | length 4.6
  Top Layer w0.4: U5.10 -14.825,15.675 -12.5,18 R25.1
NetR25_2: R25.2 T3.1 | length 53.4
  Top Layer w0.4: R25.2 -12.5,29.448 cw(c-9.96,29.448) -11.756,31.244 -8.744,34.256 cw(c-6.948,32.46) -6.948,35 13.948,35 cw(c13.948,32.46) 15.744,34.256 T3.1
NetR26_1: R26.1 U5.12 | length 5.6
  Top Layer w0.4: R26.1 -19.5,10 -16.365,13.135 U5.12
NetR26_2: R26.2 T4.1 | length 11.5
  Top Layer w0.4: T4.1 -25,6.3 R26.2
NetR27_1: R27.1 U5.5 | length 4.4
  Top Layer w0.3: U5.5 -8.935,13.135 R27.1@-6.3,10.5
NetR27_2: R27.2 T5.1 | length 11.9
  Top Layer w0.4: R27.2 0,5.3 T5.1
NetR28_1: R28.1 U5.7 | length 10.2
  Top Layer w0.4: U5.7 -6.175,15.675 -2.7,12.2 R28.1
NetR28_2: R28.2 T6.1 | length 29.3
  Top Layer w0.4: R28.2 12.8,12.2 T6.1
NetR30_1: R30.1 U5.11 | length 5.3
  Top Layer w0.4: R30.1 -17.295,14.405 U5.11
NetR30_2: R30.2 T7.1 | length 53.3
  Top Layer w0.4: T7.1 -36,-14 -36,7 -31,12 R30.2
NetR31_1: R31.1 U5.4 | length 12.9
  Top Layer w0.3: R31.1 -10.5,3.114 -9.55,4.064 -9.55,4.531 -8.3,5.781 -8.3,11.3 -8.865,11.865 U5.4
NetR31_2: R31.2 T8.1 | length 29.4
  Top Layer w0.4: R31.2 -11.5,-1.8 -11.5,-13.5 T8.1
NetR32_1: R32.1 U5.6 | length 10.4
  Top Layer w0.4: U5.6 -6.405,14.405 -2.5,10.5 R32.1
NetR32_2: R32.2 T9.1 | length 48
  Top Layer w0.4: R32.2 5,10.5 12.5,3 12.5,-12.5 T9.1
NRST: C13.2 P2.5 U3.7 | length 64.3
  Bottom Layer w0.25: P2.5 -37,25.7 -34.7,28 5.4,28 7.575,25.825 7.575,21.375 7.2,21 1.678,21 0.25,19.572 U3.7
SWCLK: P2.2 U3.37 | length 45.5
  Top Layer w0.25: v1@-20.436,8.764 -17.764,8.764 v1(-16,7)
  Bottom Layer w0.25: P2.2 -26.76,14.96 v1(-20.5,8.7) ; v1(-16,7) -16,5.5 -12.5,2 -9.4,2 -8.7,2.7 -8.7,8.1 -6.55,10.25 U3.37
SWDIO: P2.4 U3.34 | length 50
  Top Layer w0.25: v1@-19.3,7.8 -17.9,6.4 v1(-16.8,6.4)
  Bottom Layer w0.25: P2.4 -30.815,20.04 -19.35,8.575 v1(-19.35,7.926) ; v1(-16.8,6.4) -16.8,3.3 -13.5,0 -9.178,0 -7.3,1.878 -7.3,1.9 -1.75,7.45 U3.34
触摸-INT: U3.41 U5.13 | length 11.3
  Top Layer w0.25: U5.13 -13.935,11.865 v1(-13.9,11.9)
  Bottom Layer w0.25: v1(-13.9,11.9) -13.55,12.25 U3.41
触摸-SCL: R22.1 U3.42 U5.14 | length 15.9
  Top Layer w0.6: U5.14 -14.305,10.595 v1(-14.3,10.6)
  Bottom Layer w0.25: R22.1 -16.3,10.6 -14.7,10.6 ; v1(-14.3,10.6) -14.7,10.6 ; U3.42 -14.15,12.75 -14.625,12.275 -14.625,10.675 -14.7,10.6
触摸-SDA: R23.1 U3.43 U5.15 | length 18.5
  Top Layer w0.25: U5.15 -14.475,9.325 -13.1,10.7 v1(-13.1,13.4)
  Bottom Layer w0.25: R23.1 -15.35,13.25 U3.43
pads on no net: N1.1 N2.1 N3.1 N4.1 U3.3 U3.4 U3.10 U3.11 U3.12 U3.19 U3.21 U3.22 U3.25 U3.26 U3.27 U3.28 U3.29 U3.45 U3.46

## Polygon pours and split planes (outlines as drawn)
GND on Bottom Layer "Bottom Layer-No Net" (solid, remove dead copper, pour order 0): -38.8,-38.8 38.8,-38.8 38.8,38.8 -38.8,38.8
GND on Top Layer "Bottom Layer-No Net" (solid, remove dead copper, pour order 2): -38.8,-38.8 38.8,-38.8 38.8,38.8 -38.8,38.8

## Keep-outs
Keep-Out Layer:
  circle w0.1: c32.662,-32.663 r1.7
  circle w0.1: c-32.663,-32.663 r1.7
  circle w0.1: c32.662,32.663 r1.7
  circle w0.1: c-32.663,32.663 r1.7
  lines w0.1: -38.74,-32.4 ccw(c-32.4,-32.4) -32.4,-38.74 32.4,-38.74 ccw(c32.4,-32.4) 38.74,-32.4 38.74,32.4 ccw(c32.4,32.4) 32.4,38.74 -32.4,38.74 ccw(c-32.4,32.4) -38.74,32.4 -38.74,-32.4

## Other copper
Top Layer:
  region net 485-B: -13.4,-13 -14,-13.6 -14,-21.8 -13.3,-22.5 -12.4,-22.5 -11.4,-21.5 -11.4,-14.9 -12.3,-14 -12.3,-13.2 -12.5,-13
  region net 485-A: -8.4,-13 -8.5,-13.1 -8.5,-15.3 -7.3,-16.5 -6.6,-16.5 -6.5,-16.4 -6.5,-13.8 -7.3,-13
  region net GND: -3.5,-13.1 -3.6,-13.2 -3.6,-15.7 -3.3,-16 -2.8,-16 -2.5,-15.7 -2.5,-14.8 -2.6,-14.7 -2.6,-13.2 -2.7,-13.1
  region net CAN-H: 6.6,-16.5 6.5,-16.6 6.5,-17.8 7.7,-19 8.3,-19 8.5,-18.8 8.5,-16.6 8.4,-16.5
  region net 24V: 11.6,-16 11.5,-16.1 11.5,-21.3 12.7,-22.5 13.3,-22.5 13.8,-22 13.8,-16.9 12.9,-16

## Silkscreen, mask and mechanical layers (free items; w line width, h text height)
Top Overlay:
  lines w1: -43,-43 -43,43 43,43 43,-43 -43,-43
Bottom Overlay:
  text "NRST" at -31.5,22 h2
  text "SWDIO" at -30.5,19.4 h2
  text "GND" at -32.4,16.9 h2
  text "SWCLK" at -30.3,14.3 h2
  text "3.3V" at -31.4,11.7 h2
Mechanical 1:
  drawing of 337 lines, arcs and shapes, not listed
Mechanical 15:
  lines w0.1: -35.5,-34.5 35.5,-34.5 35.5,34.5 -35.5,34.5 -35.5,-34.5
  lines w0.2: -48.312,-125.116 39.688,-125.116 ; -48.312,-119.116 39.688,-119.116 ; -48.312,-113.116 39.688,-113.116 ; -48.312,-107.116 39.688,-107.116 ; -48.312,-101.116 39.688,-101.116 ; -48.312,-95.116 39.688,-95.116 ; -48.312,-89.116 39.688,-89.116 ; -27.7,-14.1 -25,-14.1 ; -27.7,-10.9 -25,-10.9 ; -27.7,14.1 -25,14.1 ; -26.312,-131.116 -26.312,-83.116 -26.312,-77.116 ; -25,-25 25,-25 ; -25,0 25,0 ; -25,25 25,25 ; -2.7,-14.1 0,-14.1 ; -2.7,-10.9 0,-10.9 ; -2.7,14.1 0,14.1 ; 0,-25 0,25 ; 22.3,-14.1 25,-14.1 ; 22.3,-10.9 25,-10.9 ; 22.3,14.1 25,14.1 ; -48.312,-83.116 -48.312,-77.116 39.688,-77.116 39.688,-83.116 ; -48.312,-83.116 39.688,-83.116 ; -48.312,-83.116 -48.312,-131.116 39.688,-131.116 39.688,-83.116
  text "公司" at -47.312,-82.116 h5
  text "杭州久天科技有限公司" at -23.312,-82.116 h5
  text "工程" at -47.312,-88.116 h5
  text "设计" at -47.312,-94.116 h5
  text "邵宁鹏" at -23.312,-94.116 h5
  text "日期" at -47.312,-100.116 h5
  text "板厚" at -47.312,-106.116 h5
  text "阻焊油" at -47.312,-112.116 h5
  text "绿色" at -23.312,-112.116 h5
  text "丝印" at -47.312,-118.116 h5
  text "白色" at -23.312,-118.116 h5
  text "板材" at -47.312,-124.116 h5
  text "FR-4" at -23.312,-124.116 h5
  text "其他" at -47.312,-130.116 h5
  text "有铅喷锡，过孔盖油" at -23.312,-130.116 h5